# EAGLE board panel (EAGLE 9.6.2)
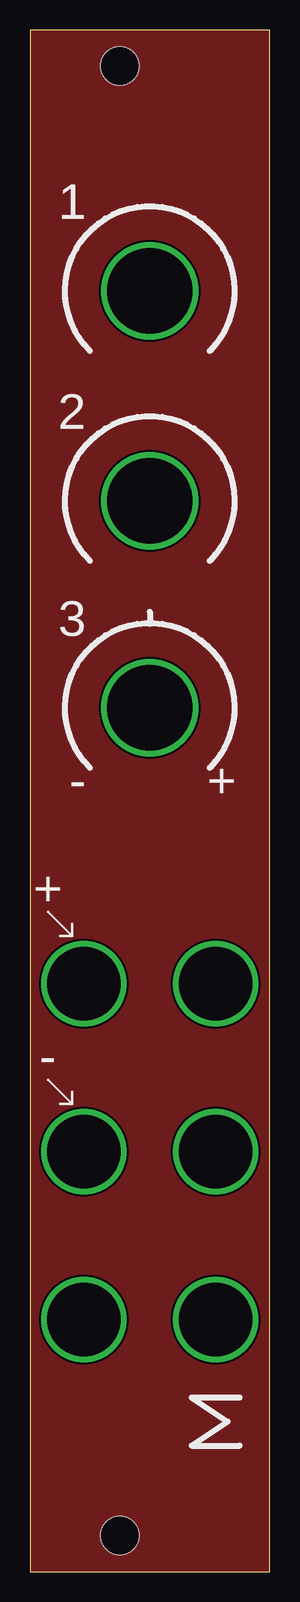
[diagram p0: board, top side]
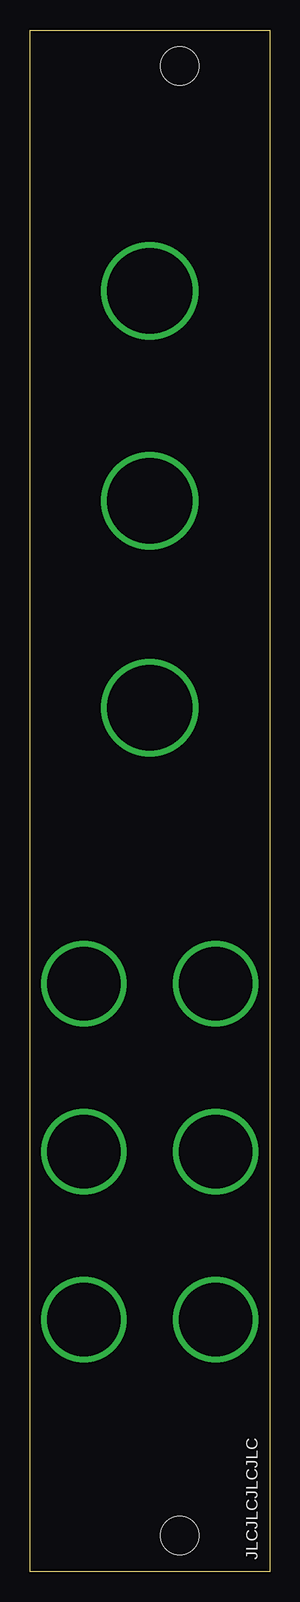
[diagram p1: board, bottom side, seen from below]

Size 20 x 128.5 mm. Coordinates in mm from the lower left corner, seen from the top.
Outline: 0,0 20,0 20,128.5 0,128.5 0,0
Copper layers (1*16): Top 0.035mm / dielectric 1.5mm / Bottom 0.035mm
Design rules "default *": minimum track width 6mil, minimum drill 0.35mm, track to track 6mil, track to pad 6mil, pad to pad 6mil, via to via 6mil, smd to smd 6mil, copper to edge 0mil, drill to drill 6mil, minimum pad ring 10mil, minimum via ring 8mil, stop-mask expansion 4mil, vias tented up to drill 0mil, thermal gap 10mil
Holes 3.2 mm at 7.5,3 7.5,125.5

## Footprints (pad centres in the part's own frame; a part is rotated, then mirrored left to right if it is on the bottom)
PANEL_POT = drill 7.1: P$1 0,0
PANEL_THONK_SOCKET = drill 6.1: P$1 0,0

## Placement (x,y rotation side)
E$1  [PANEL_POT]  10,106.75 0 top
E$2  [PANEL_POT]  10,89.25 0 top
E$3  [PANEL_POT]  10,72 0 top
E$4  [PANEL_THONK_SOCKET]  4.5,49 0 top
E$5  [PANEL_THONK_SOCKET]  4.5,35 0 top
E$6  [PANEL_THONK_SOCKET]  4.5,21 0 top
E$7  [PANEL_THONK_SOCKET]  15.5,21 0 top
E$8  [PANEL_THONK_SOCKET]  15.5,35 0 top
E$9  [PANEL_THONK_SOCKET]  15.5,49 0 top

## Library data of the parts
E$1-E$9 = MusicThingModular

## Tracks (layer width: path | path; a pad name or v marks a point on that pad's centre or on a via)
X
  pour Top: 0,128.5 0,0 20,0 20,128.5

## Text on the board
tPlace: 1 | 2 | 3 | - | + | + | -
bPlace: JLCJLCJLCJLC